# Altium PCB ESP232_USB_C_V1_2..PcbDoc (part 2 of 3)
Units mil, origin at the board's own origin, x right, y up, seen from the top; angles counter-clockwise.
Board outline 2700 x 1000 mil, 4 copper layers (L1, L2, L3, L4), stack 24.38 mil thick; 64 components, 73 nets, 299 pads, 169 vias.
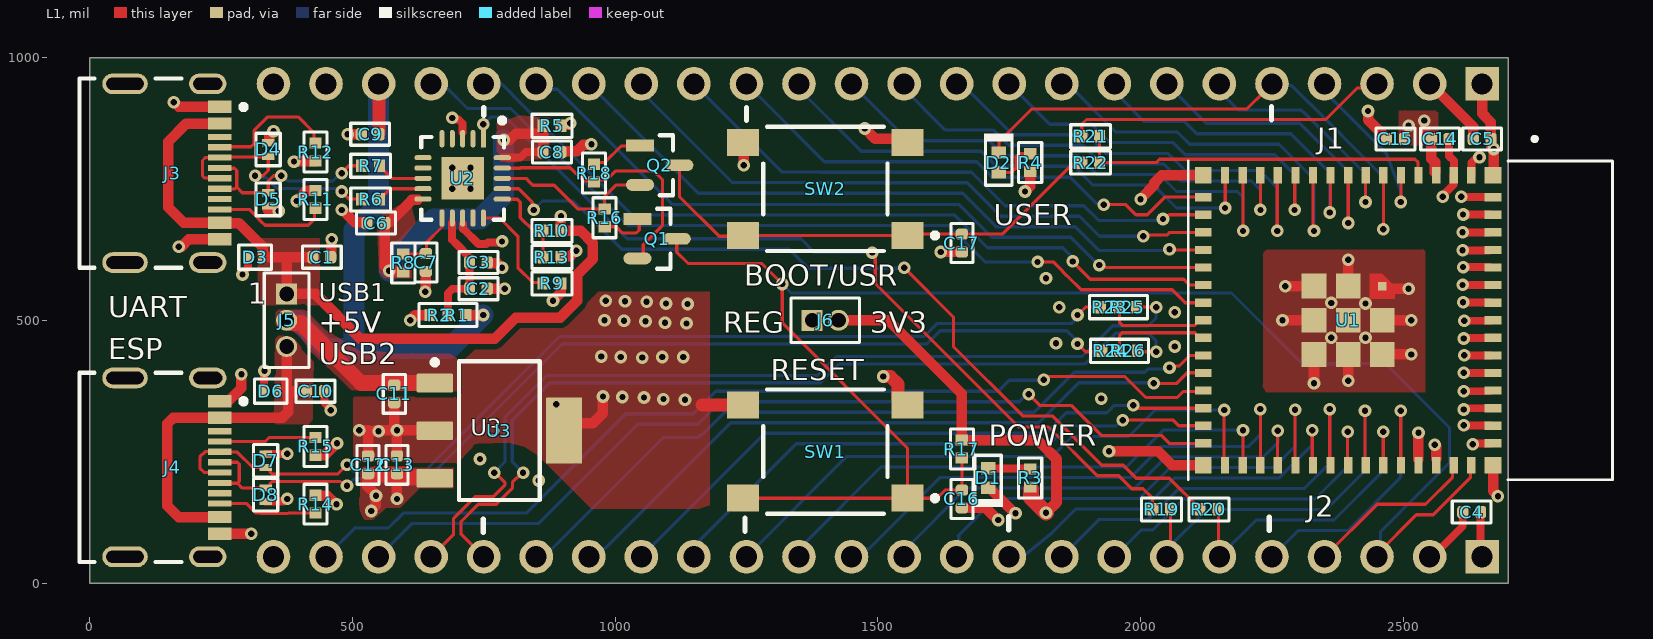
[diagram p0: L1 view]

## Via types
v1: diameter 24, hole 12, L1 to L4, tented both sides, 169 vias

## Nets (pads, with @x,y where several pads share a name; then routed paths per layer and width w, separated by ;. In a path a pad name is that pad's centre, name@x,y a point inside that pad or via, vN(x,y) a via of type N, cw(c..) or ccw(c..) an arc to the next point about the centre after c; other vN are vias at no path point)
+3V3: C4.2 C5.2 C14.2 C15.2 J1.2 J2.1 J6.2 R2.1 R3.2 R4.2 R5.1 R17.2 U1.3 | length 4670
  L1 w15: C15.2@2501.93,845 2505.06,848.13 2505.06,862.62 2510,867.56 v1(2510,870) ; C4.2@2646.93,135 2646.93,53.07 J2.1@2650,50
  L1 w20: v1(610,500) 620,510 R2.1@647.99,510 ; R5.1@897.01,870 897.01,871.18 897.64,871.81 910.73,871.81 913.92,875 v1(915,875) ; J6.2@1425,500 1520,500 1660,360 R17.2@1660,272.01 1803.99,272.01 1810.97,265.03 1840,236 1840,153.3 1820.7,134 v1(1820,134) ; v1(1780,745) 1790,755 R4.2@1790,782.99 ; 2539.5,865.06 2539.5,859.75 2553.07,846.18 C14.2@2553.07,845 2553.07,807.53 2560.24,800.36 U1.3@2560.24,781.34 ; J1.2@2551.07,950 2633.07,868 C5.2@2633.07,845
  L1 w30: R3.2@1791.5,178.5 1791.5,162.5 v1(1820,134)
  L2 w20: 2477,832 2543,766 2543,517.25 2582.7,477.55 2582.7,286.96 2600,269.67 2600,250.75 2644,206.75 2644,56 J2.1@2650,50
  L2 w40: J6.2@1425,500 J6.2@1435,500
  L2 w60: 625,495 653.54,495 691,532.46 691,636 700,645 817,762 876.54,762 878.54,760 956.46,760 ; v1(915,875) 903,863 903,813.46 956.46,760 ; J6.2@1435,500 1435,536.57 1434,537.57 1434,745 ; J1.2@2550,950 2549.23,949.23 2549.23,889.23 v1(2540,880) 2488.07,880 2454.3,846.23 2439.23,846.23 2437,844 1879,844 v1(1780,745) 1434,745 ; 956.46,760 973.46,743 1266.54,743 1268.54,745 1434,745
+3V3_FTDI: C6.2 C8.2 R5.2 R8.1 U2.10 U2.20 | length 783.8
  L1 w15: U2.20@785.41,809.37 819.37,809.37 830,820 837.05,820 C8.2@863.07,820
  L1 w20: C6.2@561.46,684.46 561.46,603.79 570,595.26 v1(570,594) 571.08,594 572.45,592.63 596.37,592.63 R8.1@597,592 ; C6.2@561.93,685 561.93,686.18 562.56,686.81 571.31,686.81 610,725.5 613.5,729 U2.10@625,729 ; v1(788,843) 799,843 811,855 855,855 ; C8.2@862.99,820.08 862.99,855
  L4 w40: v1(570,594) 570,608.28 654.72,693 743,693 788,738 v1(788,843)
+3V3_REG: C12.2 C13.2 J6.1 U3.3 | length 1214
  L1 w15: C13.2@584.7,206.3 C13.2@585,206
  L1 w20: C12.2@529.5,207.44 528.77,207.44 528.77,184.47 544.23,169 544.23,166.77 v1(545,166) 544.23,165.23 544.23,146.77 536.77,139.3 536.77,137.77 v1(536,137) ; v1(585,160) C13.2@585,206
  L1 w30: 545,206.3 584.7,206.3 597.7,206.3 603.43,200.57 655.85,200.57 U3.3@656.97,199.45
  L2 w60: 559,160 v1(585,160) 713,288 1206.54,288 1285,366.46 1285,420 J6.1@1360,495
+5V: C9.2 C11.2 J1.22 J5.2 R1.1 U3.1 | length 1400.2
  L1 w15: C9.2@550,855 C9.2@550.46,855.46 ; J1.22@550,950 J1.22@550.46,949.54
  L1 w20: R1.1@722.01,510 v1(749,510)
  L1 w25: C9.2@550.46,855.46 J1.22@550.46,949.54
  L1 w30: J5.2@375,500 376.91,498.09 383.98,498.09 387.03,495.04 401.96,495.04 516.45,380.55 U3.1@656.97,380.55
  L4 w40: J5.2@375,500 395.71,500 449.71,446 503,446 ; J1.22@550,950 550,719 503,672 503,446 ; v1(749,510) 685,446 503,446
+5V_VBUS1: C1.2 D3.2 J3.A4B9 J3.B4A9 J5.1 R10.2 | length 1468.1
  L1 w20: J3.A4B9@247.64,874.41 184.37,874.41 150,840.04 150,715 179.57,685.43 J3.B4A9@247.64,685.43 248.02,685.05 284.13,685.05 329.7,639.49 329.7,625.3 335,620 375,620 ; C1.2@425,620 375,620 ; v1(897,698) R10.2@897.01,670 935,670 958,647 958,617 927.64,586.64 927.64,537.38 895.25,505 811,505 771,465 515,465 430,550 J5.1@375,550 375,620
+5V_VBUS2: C10.2 D6.2 J4.A4B9 J4.B4A9 J5.3 | length 675.7
  L1 w20: 167,128 148,147 148,302.85 159.72,314.57 J4.A4B9@247.64,314.57 300,314.57 366.28,314.57 378,326.28 378,365 ; 169.72,125.59 J4.B4A9@247.64,125.59 ; D6.2@361,366 362,365 378,365 ; J5.3@375,450 375,368 378,365 ; C10.2@411,365 378,365
+VCC_FTDI: C2.2 C3.2 R1.2 R2.2 U2.12 | length 232.4
  L1 w10.01: U2.12@689.99,684.93 690.32,685.25 U2.12@690.32,694.59
  L1 w15: R1.2@681.99,510 682.01,551.21 690.79,560 C2.2@723.07,560 ; U2.12@689.99,684.93 689.99,665.01 690,653.28 698.28,645 722.7,620.59 722.7,600.38 723.07,600 C2.2@723.07,561.93
BTN_GPIO0: C17.2 Q2.3 R22.1 SW2.1 SW2.2 | length 878.7
  L1 w6: Q2.3@1122.42,795 1122.42,735.58 1198,660 SW2.2@1222,660 ; SW2.2@1243.5,661.42 1541.42,661.42 SW2.1@1542,662 ; SW2.1@1556.5,661.42 1558.94,663.86 1656.86,663.86 C17.2@1657,664 ; C17.2@1660,663.86 1736.86,663.86 1791,718 1791.18,718 1807,733.82 1807,734 1868.67,795.67 1882.36,795.67 1884,797.31 R22.1@1884,800
  L1 w20: SW2.2@1239.92,665 SW2.2@1243.5,661.42 ; C17.2@1659.37,663.23 C17.2@1660,663.86
CHIP_PU: C16.2 J2.3 Q1.3 R17.1 SW1.1 SW1.2 U1.45 | length 3192.6
  L1 w6: Q1.3@1117.42,655 1117.42,629.58 1139,608 1279,608 v1(1318,569) 1318,495 1556.5,256.5 SW1.1@1556.5,161.42 1612.49,161.42 1628,176.93 1657.93,176.93 1660,179 R17.1@1660,237.99 R17.1@1664.32,242.32 ; SW1.2@1243.5,161.42 1543.58,161.42 SW1.1@1549,156 ; J2.3@2450,50 2450,55.28 2524.72,130 2557,130 2627.93,200.93 2627.93,223.05 U1.45@2629.29,224.41
  L4 w6: v1(1318,569) 1335,552 2173,552 2307.82,417.18 2388.18,417.18 2389,418 2465,418 2588,295 2588,285 ; J2.3@2453,51 2456.35,54.35 2456.35,97 2587.7,228.35 2587.7,285
CON1_USB_N: D4.2 J3.A7 J3.B7 R6.1 | length 448
  L1 w6.03: J3.A7@247.64,770.08 247.2,770.51 219.49,770.51 215,775 215,804 221,810 247.09,810 J3.B7@247.64,809.45 249.02,810.83 338.62,810.83 D4.2@340,812.2 ; v1@325,775 330,775 340,785 D4.2@340,807.2 ; v1@484.69,739.3 492.99,731 R6.1@517.99,731
  L4 w6.03: v1(315,775) 318.25,771.75 335.7,771.75 356.58,750.87 469.27,750.87 475.14,745 v1(480,745)
CON1_USB_P: D5.2 J3.A6 J3.B6 R7.1 | length 367.8
  L1 w6.03: J3.B6@247.64,750.39 248.03,750 276.47,750 280,753.53 ; J3.A6@247.64,789.76 248.19,789.21 275.79,789.21 280,785 280,753.53 ; v1@355,775 350,775 340,765 D5.2@340,742.8 290.74,742.8 280,753.53 ; v1@484.69,785.7 492.99,794 R7.1@517.99,794
  L4 w6.03: v1(365,775) 367.42,775 377.52,764.9 462.87,764.9 477.97,780 v1(480,780)
CON2_USB_N: D7.2 J4.A7 J4.B7 R23.1 | length 1946.5
  L1 w6.03: J4.A7@247.64,210.24 218.3,210.24 210,218.53 210,240 220,250 230,250 230.39,249.61 J4.B7@247.64,249.61 280.48,249.61 310.09,220 D7.2@335,220 339.92,220 343.7,216.23 343.7,211.06 347.35,207.41 472.41,207.41 v1(490,225) ; v1(1880,510) 1880.19,510 1895.19,525 R23.1@1923.99,525
  L4 w6.03: v1(490,225) 502.99,212.01 512.63,212.01 515.66,215.05 640.24,215.05 730,304.81 894.18,468.99 1587.85,468.99 1612.89,494.03 1868.89,494.03 1880,505.14 v1(1880,510)
CON2_USB_P: D8.2 J4.A6 J4.B6 R24.1 | length 1910.4
  L1 w6.03: J4.B6@247.64,190.55 248.19,190 281.47,190 ; J4.A6@247.64,229.92 281.47,229.92 285,226.39 285,193.53 281.47,190 ; v1(490,185) 485.65,185 477.47,193.18 347.35,193.18 343.7,189.53 343.7,184.37 339.92,180.59 D8.2@335,180.59 290.88,180.59 281.47,190 ; v1(1880,455) 1880.19,455 1895.19,440 R24.1@1923.99,440
  L4 w6.03: v1(490,185) 502.99,197.99 518.44,197.99 521.47,201.01 646.05,201.01 744.03,299 899.99,454.95 1593.66,454.95 1618.7,480 1859.86,480 1880,459.86 v1(1880,455)
CON_ESP_USB_N: J2.21 R25.1 | length 1734
  L1 w6.03: J2.21@650,50 692.89,92.89 692.89,123.01 734.11,164.23 768.34,164.23 790.39,186.28 790.39,191.44 771.83,210 v1(770,210) ; R25.1@1995.87,525 v1(2030,525)
  L4 w6.03: v1(770,210) 790.49,230.49 790.49,315.32 870.16,395 1385,395 1421,431 1888.55,431 1947.06,489.51 2015,489.51 2029.44,503.95 2029.44,524.44 v1(2030,525)
CON_ESP_USB_P: J2.20 R26.1 | length 1724.9
  L1 w6.03: J2.20@750,61.45 J2.20@750,50 707.11,92.89 707.11,117.11 740,150 774.23,150 804.61,180.39 804.61,191.44 823.17,210 v1(825,210) ; R26.1@1995.87,440 v1(2030,440)
  L1 w6.23: R26.1@1994,441.87 R26.1@1995.87,440
  L4 w6.03: v1(825,210) 804.51,230.49 804.51,309.51 875.97,380.97 1390.81,380.97 1426.81,416.97 1894.36,416.97 1952.87,475.49 2015,475.49 2029.44,461.05 2029.44,440.56 v1(2030,440)